# Allegro board Weight_Sensor_Prototype_Board.brd
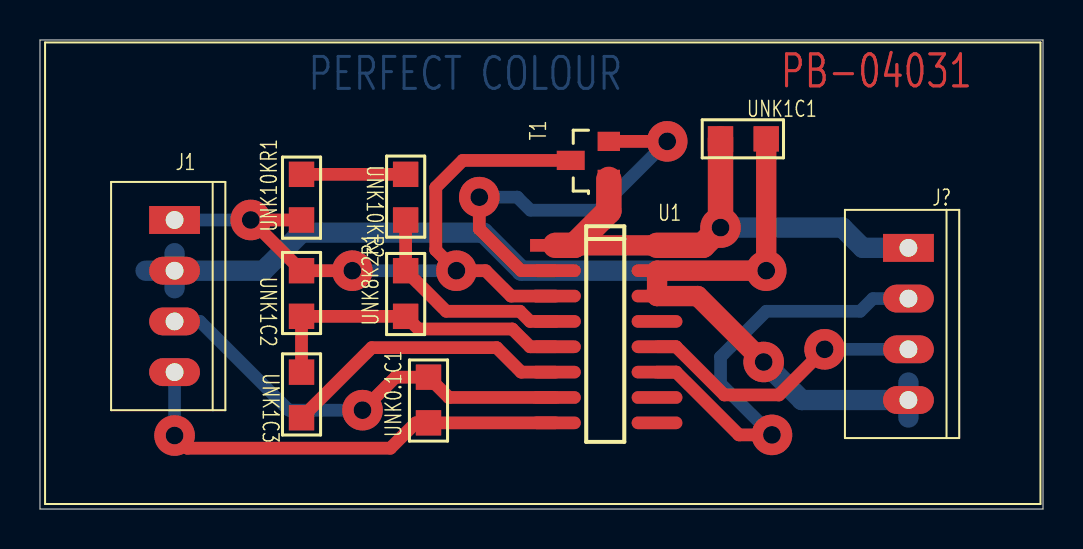
[diagram p0: board, top side]
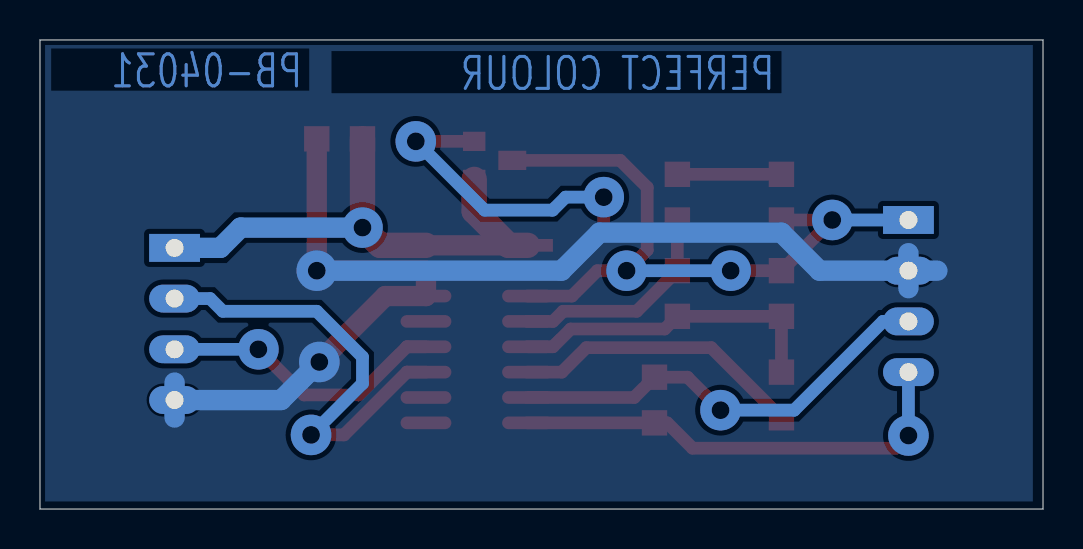
[diagram p1: board, bottom side, seen from below]

Outline 50.16 x 23.5 mm; copper layers: TOP, BOTTOM. Coordinates in mm from the lower left corner of the outline.
Outline path: 0,23.5 50.16,23.5 50.16,0 0,0 0,23.5

## Design rules (mm)
constraint set DEFAULT: min track width 0.635
nets with their own width: min track width 1.016; nets GND N01349

## Placement (name value [footprint] x y rotation side)
J1  Molex_4  [GU-MOLEX4]  6.73 14.48 0 top
J?  Molex_4_1  [GU-MOLEX4]  43.43 13.08 0 top
T1  PNP_Transistor  [GU-SOT23]  28.45 16.51 90 top
U1  HX711  [GU-SOIC16]  25.78 13.21 270 top
UNK0.1C1  100nF_Capacitor  [GU-C0805]  19.43 4.32 90 top
UNK1C1  1uF_Capacitor  [GU-C0805]  34.04 18.54 0 top
UNK1C2  1uF_Capacitor  [GU-C0805]  13.08 11.94 270 top
UNK1C3  1uF_Capacitor  [GU-C0805]  13.08 6.86 270 top
UNK8K2R1  8K2_ Resistor  [GU-R0805]  18.29 9.65 90 top
UNK10KR1  10K_Resistor  [GU-R0805]  13.08 14.48 90 top
UNK10KR2  10K_Resistor  [GU-R0805]  18.29 16.76 270 top

## Library data of the parts
J1 = Molex_4
J? = Molex_4_1
T1 = PNP_Transistor
U1 = HX711
UNK0.1C1 = 100nF_Capacitor
UNK1C1-UNK1C3 = 1uF_Capacitor
UNK8K2R1 = 8K2_ Resistor
UNK10KR1 UNK10KR2 = 10K_Resistor

## Footprints (pads in the part's own frame, mm; a bottom-side part is the same pattern mirrored in y, then rotated)
GU-C0805
  rect 1.27x1.27 smd: 1(0,0) 2(2.286,0)
GU-MOLEX4
  rect 2.54x1.397 hole 0.889: 1(0,0)
  oval 2.54x1.397 hole 0.889: 2(0,-2.54) 3(0,-5.08) 4(0,-7.62)
GU-R0805
  rect 1.27x1.27 smd: 1(0,0) 2(2.286,0)
GU-SOIC16
  rect 0.635x2.54 smd: 1(0,0)
  oval 0.635x2.54 smd: 2(1.27,0) 3(2.54,0) 4(3.81,0) 5(5.08,0) 6(6.35,0) 7(7.62,0) 8(8.89,0) 9(8.89,5.08) 10(7.62,5.08) 11(6.35,5.08) 12(5.08,5.08) 13(3.81,5.08) 14(2.54,5.08) 15(1.27,5.08) 16(0,5.08)
GU-SOT23
  rect 0.965x1.118 smd: 1(0,0) 2(1.905,0)
  rect 0.965x1.397 smd: 3(0.953,1.905)

## Nets
GND: J1.2(E-) J?.4 U1.14(X1) U1.15 UNK1C1.2
N00899: J1.1 T1.3 U1.3 UNK1C2.1 UNK10KR1.1
N00922: U1.4 UNK8K2R1.2 UNK10KR2.2
N00999: U1.5 UNK1C2.2 UNK1C3.1 UNK8K2R1.1
N01337: T1.2 U1.2
N01349: J?.1(VCC) T1.1(E) U1.1 U1.16 UNK1C1.1
N01838: J?.3 U1.12
N02025: J?.2 U1.11
N02152: J1.3 U1.7 UNK0.1C1.2
N02261: J1.4 U1.8 UNK0.1C1.1
N06791: U1.6 UNK1C3.2
N068681: UNK10KR1.2 UNK10KR2.1

Pads without a net: U1 9 10 13

## Via types
v1: diameter 2.032, hole 0.889, TOP to BOTTOM, 12 vias

## Routing (per net, layer and track width the routed paths; a pad name or vN(x,y) marks a point on that pad's centre or on a via; arc(x,y) is an arc through that point)
GND: length 64.3
  TOP w1.016: v1(36.19,7.37) 32.89,10.67 U1.14 U1.15 v1(36.32,11.94) UNK1C1.2
  BOTTOM w1.016: 6.73,11.06 J1.2 ; J1.2 6.73,12.81 ; J1.2 5.28,11.94 ; J1.2 11.18,11.94 13.08,13.84 22.18,13.84 24.08,11.94 v1(36.32,11.94) ; v1(36.19,7.37) 38.1,5.46 J?.4 ; J?.4 43.43,6.34 ; J?.4 43.56,5.46 ; J?.4 43.43,4.58
N00899: length 35.1
  TOP w0.635: v1(15.62,11.94) UNK1C2.1 v1(10.54,14.48) UNK10KR1.1 ; U1.3 23.56,10.67 22.29,11.94 v1(20.83,11.94) 19.8,12.97 19.8,16.11 21.15,17.46 T1.3
  BOTTOM w0.635: v1(10.54,14.48) J1.1 ; v1(20.83,11.94) v1(15.62,11.94)
N00922: length 11.1
  TOP w0.635: U1.4 24.51,9.4 24,9.91 20.32,9.91 UNK8K2R1.2 UNK10KR2.2
N00999: length 16.1
  TOP w0.635: U1.5 24.51,8.13 23.62,9.02 18.92,9.02 UNK8K2R1.1 UNK1C2.2 UNK1C3.1
N01337: length 20.3
  TOP w0.635: v1(21.97,15.62) 21.97,14.03 24.07,11.94 U1.2 ; v1(31.37,18.41) T1.2
  BOTTOM w0.635: v1(21.97,15.62) 23.88,15.62 24.53,14.97 27.92,14.97 v1(31.37,18.41)
N01349: length 26.9
  TOP w1.016: 26.73,13.21 U1.16
  TOP w1.27: U1.16 33.15,13.21 v1(34.04,14.1) UNK1C1.1 ; T1.1 28.45,14.92 26.73,13.21 U1.1
  BOTTOM w1.016: v1(34.04,14.1) 40.13,14.1 41.15,13.08 J?.1
N01838: length 14.6
  TOP w0.635: v1(39.24,8) 36.96,5.72 34.23,5.72 31.81,8.13 U1.12
  BOTTOM w0.635: v1(39.24,8) J?.3 43.56,8
N02025: length 22.6
  TOP w0.635: U1.11 31.81,6.86 34.96,3.71 v1(36.61,3.71)
  BOTTOM w0.635: v1(36.61,3.71) 34.04,6.29 34.04,7.62 36.32,9.91 41.02,9.91 41.66,10.54 J?.2
N02152: length 22
  TOP w0.635: v1(16.13,4.95) 17.78,6.6 UNK0.1C1.2 20.45,5.59 U1.7
  BOTTOM w0.635: v1(16.13,4.95) 12.45,4.95 8,9.4 J1.3
N02261: length 23
  TOP w0.635: v1(6.73,3.68) 7.37,3.05 17.53,3.05 18.8,4.32 UNK0.1C1.1 U1.8
  BOTTOM w0.635: v1(6.73,3.68) J1.4
N06791: length 14.7
  TOP w0.635: UNK1C3.2 16.59,8.08 22.84,8.08 24.07,6.86 U1.6
N068681: length 5.2
  TOP w0.635: UNK10KR1.2 UNK10KR2.1

## Copper pours and planes (outline as drawn; the poured copper is in the pictures)
GND on BOTTOM: 0.51,23.24 0.51,0.38 49.91,0.38 49.91,23.24

## Text on the board
BOTTOM: PERFECT COLOUR | PB-04031
TOP: PB-04031
